# Altium PCB QCM_circuit.PcbDoc
Units mm, origin at the board's own origin, x right, y up, seen from the top; angles counter-clockwise.
Board outline 100 x 45 mm, 2 copper layers (Top Layer, Bottom Layer), stack 0.78 mm thick; 41 components, 21 nets, 118 pads, 195 vias.
Unrouted connection lines stored in the file: 3.
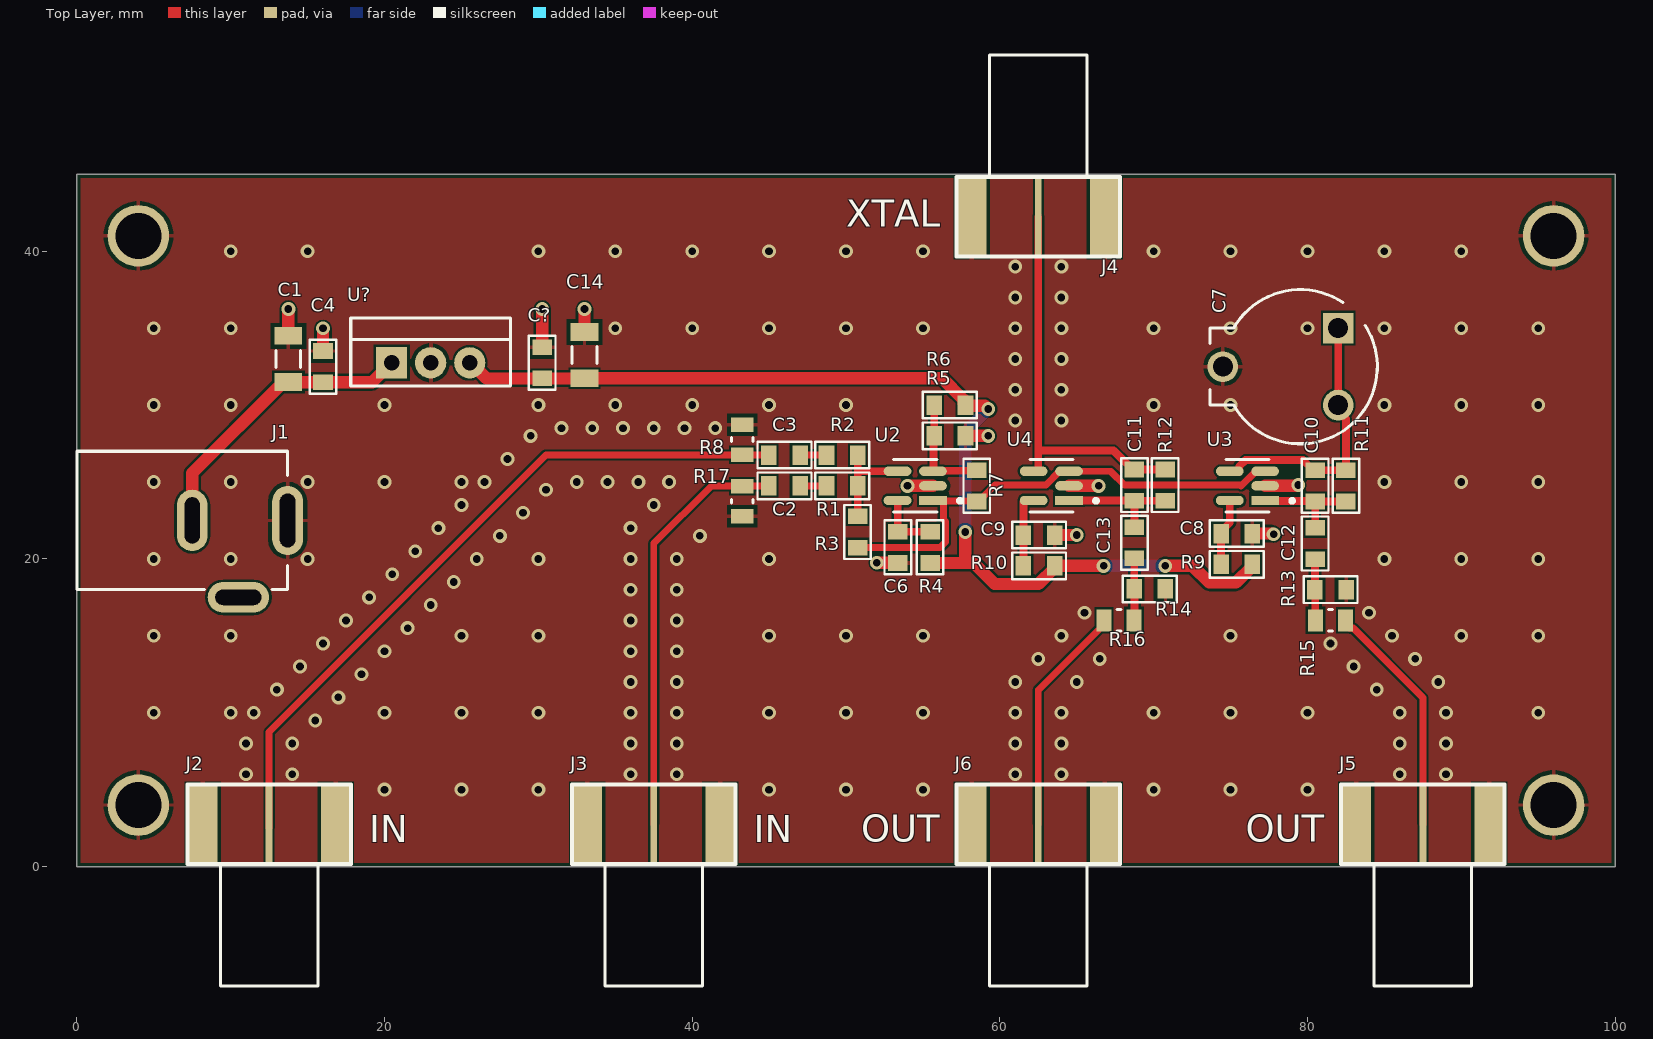
[diagram p0: Top Layer view]
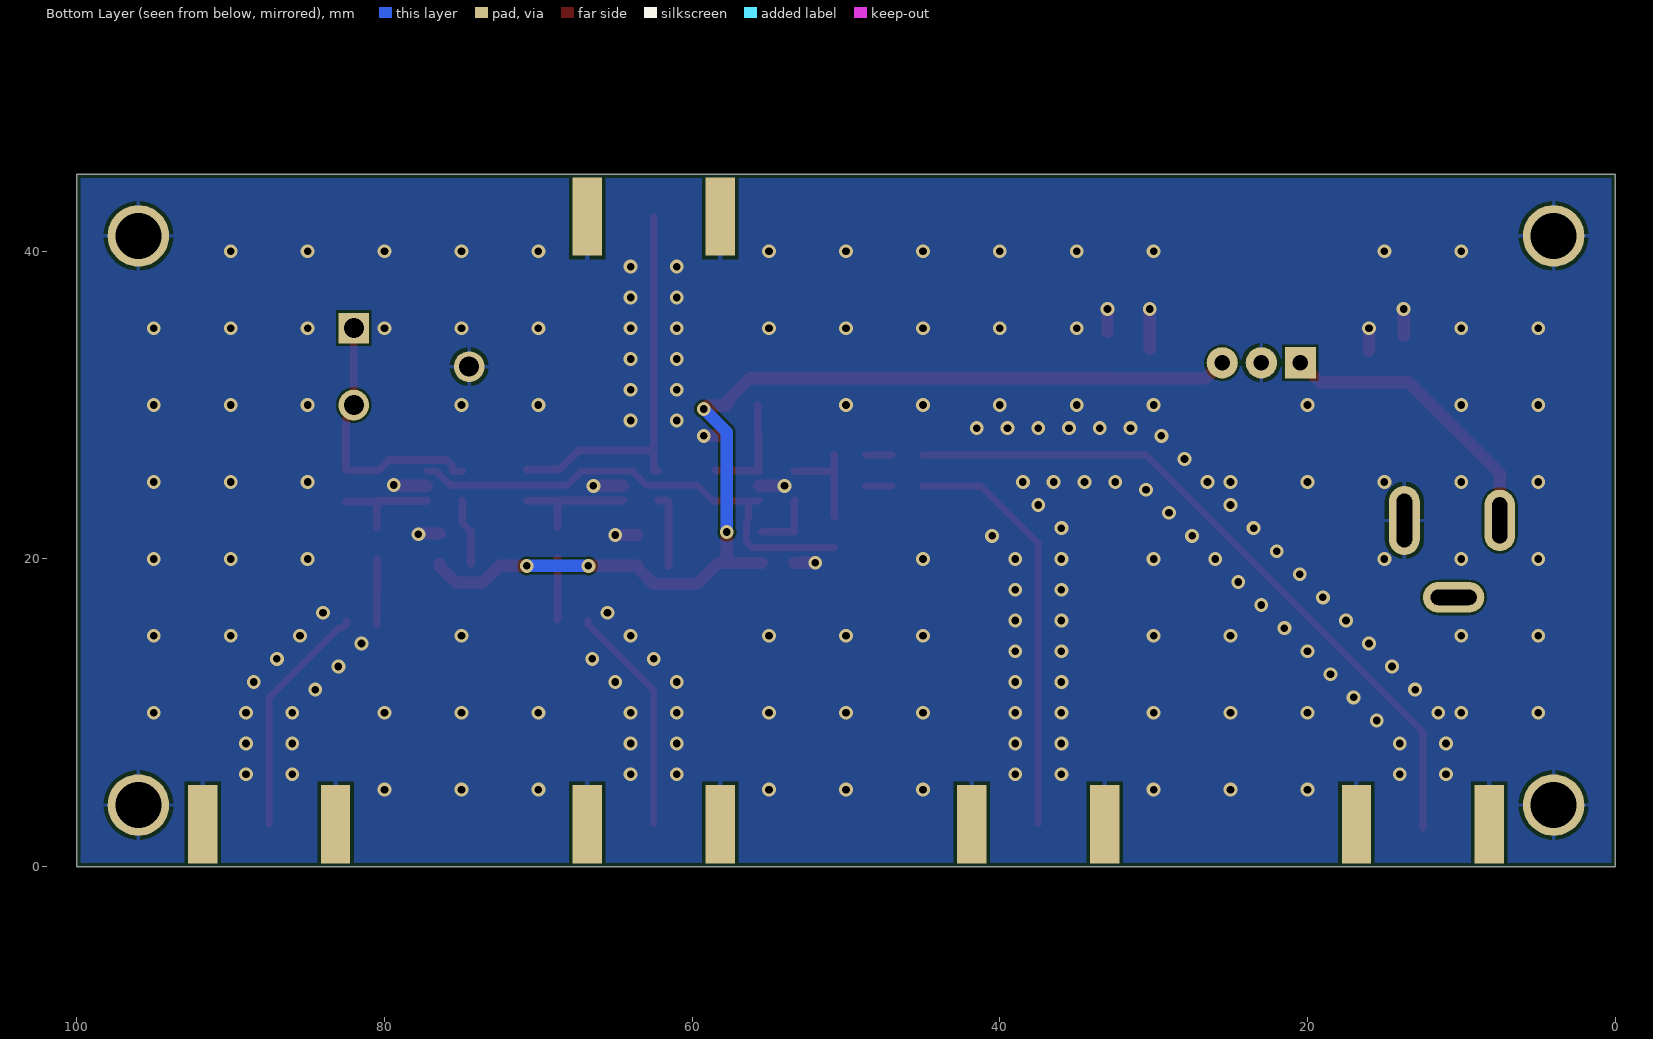
[diagram p1: Bottom Layer view, seen from below]
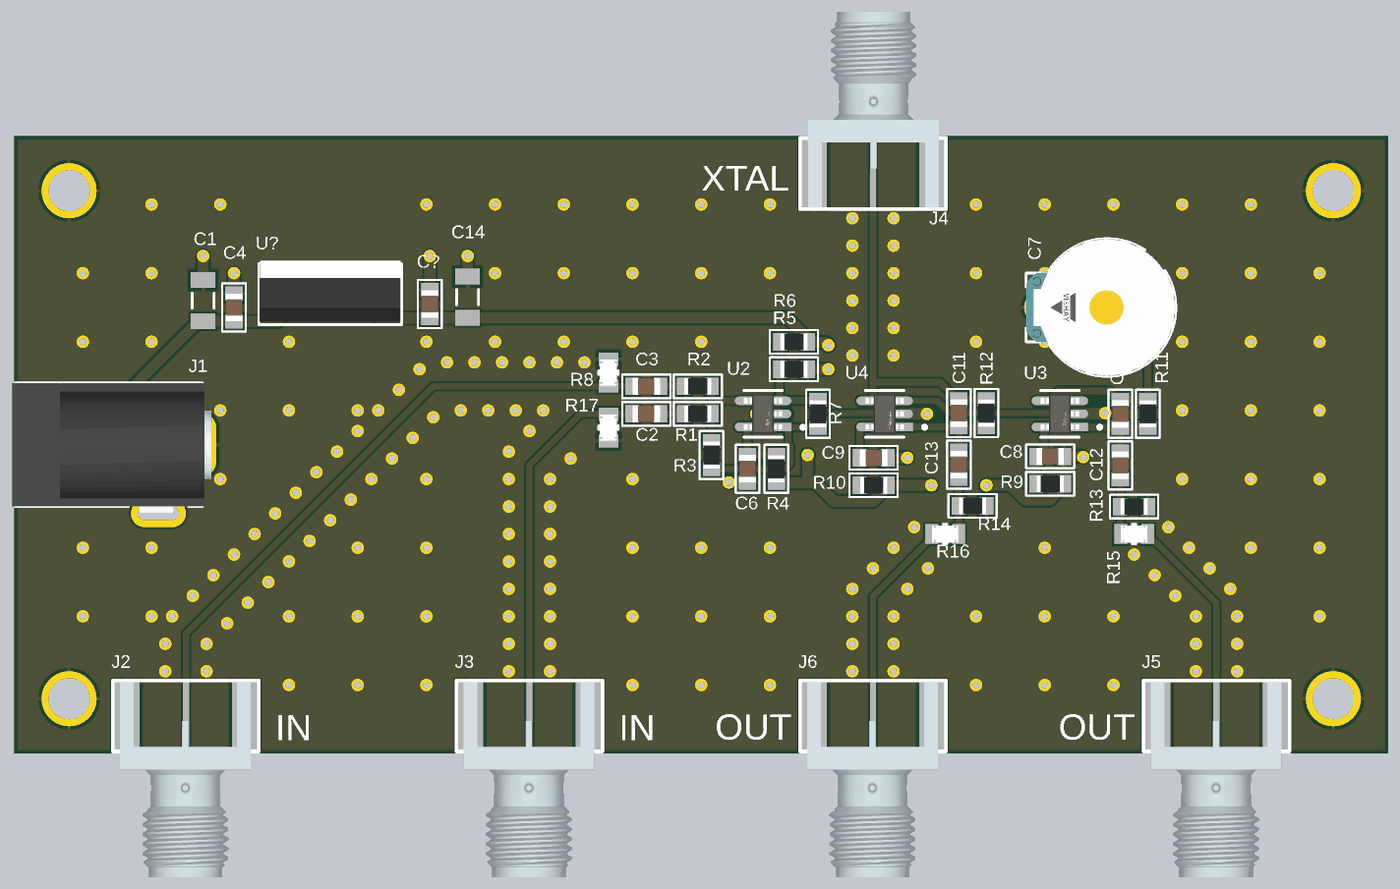
[diagram p2: 3D render of the assembled board from above, using the file's embedded part models]

## Layer stack, top to bottom
Top Solder: solder mask 0.01, Solder Resist, Dk 3.5
Top Layer: signal copper 0.035
Dielectric2: core 0.71, FR-4, Dk 4.3
Bottom Layer: signal copper 0.035
Bottom Solder: solder mask 0.01, Solder Resist, Dk 3.5

## Board outline
0,0 100,0 100,45 0,45

## Design rules (kind name [scope] priority, off if disabled: settings)
AssemblyTestPointUsage [All] p1 off:
AssemblyTestpoint [All] p1 off: testpointundercomponent=TRUE minsize=1.016 maxsize=2.54 preferedsize=1.524 minholesize=0 maxholesize=1.016 preferedholesize=0.813 testpointgrid=0.025 usegrid=TRUE gridtolerance=0 allowsidetop=TRUE allowsidebottom=TRUE
BoardOutlineClearance [All] p1: gap=0.25 ignorepadtopadclearanceinfootprint=FALSE except(0: Arc-SplitContinuation Track-SplitContinuation SMDPad-SplitContinuation THPad-SplitContinuation Via-SplitContinuation Fill-SplitContinuation Poly-SplitContinuation Region-SplitContinuation Text-SplitContinuation)
Clearance Clearance-xPP-xTP-xTT [All] p1: gap=0.15 ignorepadtopadclearanceinfootprint=FALSE except(0.01: Fill-Hole Poly-Hole Region-Hole Text-Hole; 0.2: Arc-Hole Track-Hole SMDPad-Hole THPad-Hole Via-Hole; 0.25: Arc-Arc Arc-Track Track-Track)
ComponentClearance [All] p1: gap=0.25 collisioncheckmode=3 verticalgap=0.25 showdistances=FALSE
DiffPairsRouting [All] p1: maxlimit=0.25 minlimit=0.25 mostfreqgap=0.25 toplayer_minwidth=0.381 toplayer_maxwidth=0.381 toplayer_prefwidth=0.381 bottomlayer_minwidth=0.381 bottomlayer_maxwidth=0.381 bottomlayer_prefwidth=0.381 maxuncoupledlength=12.5
FabricationTestPointUsage [All] p1 off: valid=0 allowmultiple=FALSE
FabricationTestpoint [All] p1 off: side=3 testpointundercomponent=TRUE minsize=1.016 maxsize=2.54 preferedsize=1.524 minholesize=0 maxholesize=1.016 preferedholesize=0.813 testpointgrid=0.025 allowsidetop=TRUE allowsidebottom=TRUE usegrid=TRUE gridtolerance=0
Height [All] p1: minheight=0 maxheight=25 prefheight=12.5
HoleSize HoleSize-PTH [All] p1: absolutevalues=TRUE maxlimit=7 minlimit=0.25 maxpercent=80.000 minpercent=20.000
HoleToHoleClearance [All] p1: gap=0.35 allowstackedmicrovias=TRUE
MinimumAnnularRing "Minimum IAR  >0.34mm" [((ObjectKind = 'Pad') OR (ObjectKind = 'Via')) And (Layer = 'MultiLayer') And (HoleDiameter > AsMM(0.34))] p1: minimumring=0.125 // minimum inner annular ring for pads > 0.45mm finished hole size
MinimumAnnularRing "Minimum IAR <=0.34mm" [((ObjectKind = 'Pad') OR (ObjectKind = 'Via')) And (Layer = 'MultiLayer') And (HoleDiameter <= AsMM(0.34))] p2: minimumring=0.175 // minimum inner annular ring for pads <= 0.45mm finished hole size
MinimumSolderMaskSliver [All] p1: minsoldermaskwidth=0.08
PlaneClearance PlaneClearance-IPI [All] p1: clearance=0.25
PlaneConnect [All] p1: planeconnectstyle=Direct reliefexpansion=0.25 reliefentries=4 reliefconductorwidth=0.5 reliefairgap=0.25
PolygonConnect PolygonConnect-xTW [All] p1: thpad.connectstyle=Relief thpad.reliefconductorwidth=0.25 thpad.reliefentries=4 thpad.polygonreliefangle="90 Angle" thpad.airgapwidth=0.25 smdpad.connectstyle=Relief smdpad.reliefconductorwidth=0.25 smdpad.reliefentries=2 smdpad.polygonreliefangle="0 Angle" smdpad.airgapwidth=0.25 via.connectstyle=Relief via.reliefconductorwidth=0.25 via.reliefentries=4 via.polygonreliefangle="90 Angle" via.airgapwidth=0.25
RoutingCorners [All] p1: cornerstyle=45-Degree minsetback=2.5 maxsetback=2.5
RoutingVias [InNet('+9')] p1: holewidth=0.711 width=1.27 viastyle="Through Hole" minholewidth=0.711 minwidth=1.27 maxholewidth=0.711 maxwidth=1.27
RoutingVias "Routing VIAs" [All] p2: holewidth=0.5 width=0.85 viastyle="Through Hole" minholewidth=0.5 minwidth=0.85 maxholewidth=0.9 maxwidth=1.25 useviatemplates=TRUE viatemplateguid#1={331BAD09-FCF4-48D2-A875-4A33C9B82B72} viatemplateguid#2={6A946846-BB7C-48EE-9F70-67F61FD11D76} viatemplatename#1=via_r65h25_mm viatemplatename#2=via_r90h50_mm // Standard VIAs
SMDNeckDown [All] p1: percent=100.000
SilkToSilkClearance [All] p1: silktosilkclearance=0.05
SilkToSolderMaskClearance SilkscreenOverComponentPads [IsPad] p1: minsilkscreentomaskgap=0.1 clearancetoexposedcopper=TRUE
SolderMaskExpansion [All] p1: expansion=0 istentingtop=FALSE
SupplyNets "Schematic Supply Nets_2" [InNet('+9')] p1: voltage=0.000
SupplyNets "Schematic Supply Nets_1" [InNet('+12')] p2: voltage=0.000
SupplyNets "Schematic Supply Nets" [InNet('GND')] p3: voltage=0.000
UnRoutedNet [All] p1: checkbadconnections=TRUE
Width Width_PWR [InNet('GND')] p1: maxlimit=1 minlimit=0.5 preferedwidth=0.5 minimp=50.000000 maximp=50.000000 favimp=50.000000
Width Width-xTW [All] p2: maxlimit=10 minlimit=0.15 preferedwidth=0.5 minimp=50.000000 maximp=50.000000 favimp=50.000000
14 further rules are at their usual default settings.

## Classes and differential pairs
component class QCM_circuit: C1 C3 C6 C8 C10 C12 C? J1 J2 J3 J5 R1 R2 R3 R4 R5 R6 R7 R10 R11 R12 R15 U2 U3 U?

## Components (designator, comment, footprint, x,y, rotation, side; value= is the part's Value field where it differs from the comment)
C1 "CAP 68nF 100V 1206(3216)" CAPC1206(3216)170_N 13.75,33 r270 top value=68nF
C2 "C_0805" C_0805 46,24.75 r0 top
C3 "C_0805" C_0805 46,26.75 r0 top
C4 "C_0805" C_0805 16,32.5 r270 top
C6 "100nF" C_0805 53.37,20.75 r270 top
C7 "FC280832659" FP-BFC280832659-MFG 79.5,32.5 r270 top value=5.5-65pF
C8 "100nF" C_0805 75.4,21.65 r0 top
C9 "100nF" C_0805 62.55,21.55 r0 top
C10 "C_0805" C_0805 80.5,24.75 r90 top
C11 "C_0805" C_0805 68.75,24.8 r90 top
C12 "C_0805" C_0805 80.5,21 r270 top
C13 "C_0805" C_0805 68.75,21.05 r270 top
C14 "CAP 68nF 100V 1206(3216)" CAPC1206(3216)170_N 33,33.25 r270 top value=68nF
C? "C_0805" C_0805 30.25,32.75 r270 top
J1 "KLDX-0202-B" KYCN-KLDX-0202-B_V 0,22.5 r0 top
J2 "SMA" SMA_SM_JOHNSON_142-0701-841 12.5,2.75 r180 top
J3 "SMA" SMA_SM_JOHNSON_142-0701-841 37.5,2.75 r180 top
J4 "SMA" SMA_SM_JOHNSON_142-0701-841 62.5,42.25 r0 top
J5 "SMA" SMA_SM_JOHNSON_142-0701-841 87.5,2.75 r180 top
J6 "SMA" SMA_SM_JOHNSON_142-0701-841 62.5,2.75 r180 top
R1 "R_0805" R_0805 49.75,24.75 r180 top
R2 "R_0805" R_0805 49.75,26.75 r180 top
R3 "R_0805" R_0805 50.75,21.75 r90 top
R4 "10" R_0805 55.465,20.75 r90 top
R5 "R_0805" R_0805 56.75,28 r0 top
R6 "R_0805" R_0805 56.75,30 r180 top
R7 "DNP" R_0805 58.5,24.75 r90 top
R8 "CRCW080550R0FKTA" FP-D12-CRCW0805-MFG 43.25,27.75 r270 top
R9 "10" R_0805 75.4,19.65 r180 top
R10 "10" R_0805 62.55,19.55 r180 top
R11 "R_0805" R_0805 82.5,24.75 r270 top
R12 "R_0805" R_0805 70.75,24.8 r270 top
R13 "100k" R_0805 81.5,18 r0 top
R14 "100k" R_0805 69.75,18.05 r0 top
R15 "CRCW080550R0FKTA" FP-D12-CRCW0805-MFG 81.5,16 r0 top
R16 "CRCW080550R0FKTA" FP-D12-CRCW0805-MFG 67.75,16 r180 top
R17 "CRCW080550R0FKTA" FP-D12-CRCW0805-MFG 43.25,23.75 r90 top
U2 "OPA656NB/250" FP-DBV0005A-IPC_A 54.5,24.75 r180 top
U3 "OPA656NB/250" FP-DBV0005A-IPC_A 76.1,24.75 r180 top
U4 "OPA656NB/250" FP-DBV0005A-IPC_A 63.35,24.75 r180 top
U? "7809" TO220V 23,32.75 r0 top

## Footprints (in the part's own frame and the unit in brackets; to place one, negate y for a bottom-side part, rotate by r counter-clockwise, add the part's x,y. Pads: shape width x height; smd on the part's side, far side on the other; paste and mask are expansions set on the pad)
C_0805 [mil]
  rect 40x50 smd: 1(-40,0) 2(40,0)
  silkscreen extent -69,-34 69,34, body extent -39,-25 39,25, height 49
CAPC1206(3216)170_N [mm] "Chip Capacitor, Body 3.2x1.6mm, Height 1.7mm, IPC Medium Density"
  rect 1.15x1.8 smd: 1(-1.5,0) 2(1.5,0)
  silkscreen extent -0.55,-0.8 0.55,0.8, body extent -1.7,-0.9 1.7,0.9, height 1.7
FP-BFC280832659-MFG [mm]
  rect 2x2 hole 1.3 paste-2539.97 mask+0: 1(-2.5,2.5)
  round 2 hole 1.3 paste-2539.97 mask+0: 2(2.5,2.5) 3(0,-5)
  silkscreen extent -5.01,-5.85 5.02,5.04, body extent -5.4,-6.1 5.4,5.2, height 0.25
FP-D12-CRCW0805-MFG [mm]
  rect 0.95x1.45 smd paste+0 mask+0: 1(-0.975,0) 2(0.975,0)
  silkscreen extent -0.13,-0.7 0.13,0.7, body extent -1.55,-0.82 1.55,0.82, height 0.25
FP-DBV0005A-IPC_A [mm]
  rect 1.805x0.612 smd paste+0 mask+0: 1(-1.15,0.95)
  rrect100% 1.805x0.612 smd paste+0 mask+0: 2(-1.15,0) 3(-1.15,-0.95) 4(1.15,-0.95) 5(1.15,0.95)
  silkscreen extent -3.03,-1.7 1.4,1.7, body extent -2.55,-1.95 2.55,1.95, height 0.25
KYCN-KLDX-0202-B_V [mm] "3 Conductor Jack, 9 x 14.5 mm Body"
  oval 2x4.5 hole 1 slot 3.5 at 90 deg: 1(13.7,0)
  oval 2x4 hole 1 slot 3 at 90 deg: 2(7.5,0)
  oval 4x2 hole 1 slot 3 at 0 deg: 3(10.5,-5)
  silkscreen extent 0,-4.5 13.7,4.5, body extent -0.15,-5 14.35,4.5, height 11
R_0805 [mil] "R 0805"
  rect 40x50 smd: 1(-40,0) 2(40,0)
  silkscreen extent -69,-34 69,34, body extent -39,-24 39,24, height 18
SMA_SM_JOHNSON_142-0701-841 [mil] "SMA PCB Surface Mount Johnson 142-0701-841"
  rect 17.72x200 smd: 1(0,0)
  rect 75x200 smd: 2(-170,0) 2(170,0) 2(170,0)
  rect 75x200 smd far side: 2(-170,0) 2(170,0)
  silkscreen extent -209,-102 209,414, body extent -186,-98 189,464, height 156
TO220V [mil] "TO220V"
  rect 80x80 hole 40: 1(-100,0)
  round 80 hole 40: 2(0,0) 3(100,0)
  silkscreen extent -205,-59 205,115, body extent -202,-51 202,124, height 743

## Part data
C1 C14: library part CMP-1037-04098-1, "CAP 68nF 100V ±5% 1206 (3216 Metric) Thickness 1.7mm SMD", Case-EIA=1206, Case-Metric=3216, Rated Voltage="100 V", Tolerance=Â±5%, Max Thickness="1.7 mm", Technology=SMT
C6 C8 C9: library part C_0805
C7: library part CMP-02422-000001-1, "CAP TRIMMER 5.5-65PF 150V TH", Capacitance=5.5-65pF, Manufacturer="Vishay BC Components", Manufacturer Part Number=BFC280832659, Temperature="-40°C to +70°C", Temperature Coefficient=+300/-700ppm/°C, Temperature Range High=+70°C, Temperature Range Low=-40°C, Voltage Rating=150V, Automotive=No, Category=Cap, ComponentLink2Description=Datasheet, ComponentLink2URL=https://www.vishay.com/docs/28528/bfc2808-10mm.pdf, Device Class L1="Passive Components", Device Class L2=Capacitors, Device Class L3="Trimmer / Variable Capacitors", Digikey Description="CAP TRIMMER 5.5-65PF 150V TH", Height=11mm, Lead Free=Yes, Material=Polypropylene, Mouser Description="Trimmer / Variable Capacitors TRIMMER CAPACITOR", Octopart=https://octopart.com/bfc280832659-vishay-41937824, Package=BFC280832659, RoHS=TRUE
J1: library part CMP-0256-00001-1, "3 Conductor Power Jack, 2 break 2 aux contacts", ComponentLink1Description="Manufacturer URL", ComponentLink1URL=http://kycon.com/, ComponentLink2Description=Datasheet, ComponentLink2URL=http://anacapa.kycon.com/Catalog_PDF/KLDX_0202.pdf, Contact Finish=Brass, Mounting Technology="Through Hole", PackageDescription="Jack, 9 x 14.5 mm Body, 2.5 mm Center Pin Diameter", PackageReference=KLDX-0202-B, PartNumber=KLDX-0202-B
J2 J3 J4 J5 J6: library part SMA_SM_JOHNSON_142-0701-841
R4 R7 R9 R10 R13 R14: library part R_0805
R8 R15 R16 R17: library part CMP-00030-21390498-1, "CRCW080550R0FKTA Res Thick Film 0805 50 Ohm 1% 0.125W(1/8W) ±100ppm/C Pad SMD Automotive T/R", Case Code (Imperial)=0805, Case Code (Metric)=2012, Max Operating Temperature=155°C, Min Operating Temperature=-55°C, Power Rating=125mW, Resistance=50Ω, Temperature Coefficient=100ppm/°C, Tolerance=1%, Voltage Rating=150V, Case/Package=0805, Composition="Thick Film", Contact Plating="Lead, Tin", Height=450µm, Lead Free="Contains Lead", Length=2mm, NexarPartId=21390498, RoHS=Non-Compliant, Weight=5.499807mg, Width=1.25mm
U2 U3 U4: library part CMP-0018-00414-3, "IC OPAMP VFB 1 CIRCUIT SOT23-5", Case/Package=SOT-23, Dual Supply Voltage=5V, Input Bias Current=20pA, Input Offset Voltage (Vos)=600uV, Max Dual Supply Voltage=6V, Max Operating Temperature=85°C, Max Supply Voltage=12V, Min Operating Temperature=-40°C, Min Supply Voltage=10V, Nominal Supply Current=16mA, Package Quantity=250, Power Supply Rejection Ratio (PSRR)=74dB, Bandwidth=230MHz, Common Mode Rejection Ratio=88dB, Gain Bandwidth Product=230MHz, Height=1.15mm, Lead Free="Lead Free", Length=2.9mm, Max I/O Voltage=600uV, Number of Amplifiers=1, Number of Channels=1, Number of Circuits=1, Number of Elements=1, Number of Pins=5, Operating Supply Voltage=12V, Packaging="Tape and Reel", Radiation Hardening=No, REACH SVHC="No SVHC", Settling Time=16ns, Slew Rate=290V/µs, Unity Gain Bandwidth Product=230MHz, Width=1.6mm
U?: "Standard +9V 1A positive fixed voltage regulator in TO-220 housing", Case/Package=TO, Dropout Voltage=2V, Manufacturer 1=STMicroelectronics, Manufacturer Part Number 1=L7809CV, Max Input Voltage=35V, Max Operating Temperature=125°C, Max Output Current=1.5A, Min Input Voltage=11V, Min Operating Temperature=0°C, Min Output Voltage=9V, Package Quantity=50, Power Supply Rejection Ratio (PSRR)=55dB, Quiescent Current=8mA, Supplier Part Number 1=511-L7809CV, Tolerance=5%, Accuracy=2%, ComponentLink1Description=http://www.jameco.com/Jameco/Products/ProdDS/902071.pdf, ComponentLink1URL=http://www.jameco.com/Jameco/Products/ProdDS/902071.pdf, ComponentLink2Description=http://www.ti.com/lit/ds/symlink/lm7805c.pdf, ComponentLink2URL=http://www.ti.com/lit/ds/symlink/lm7805c.pdf, ComponentLink3Description=http://www.ti.com/general/docs/lit/getliterature.tsp?genericPartNumber=LM7815C&&fileType=pdf, ComponentLink3URL=http://www.ti.com/general/docs/lit/getliterature.tsp?genericPartNumber=LM7815C&&fileType=pdf, ComponentLink4Description=https://datasheet.ciiva.com/27055/1991694-27055797.pdf?src-supplier=Jameco, ComponentLink4URL=https://datasheet.ciiva.com/27055/1991694-27055797.pdf?src-supplier=Jameco, ComponentLink5Description=https://datasheet.ciiva.com/26331/179191-da-01-en-spannungsregler-l7809cv-to-220-stm-26331022.pdf?src-supplier=Conrad, ComponentLink5URL=https://datasheet.ciiva.com/26331/179191-da-01-en-spannungsregler-l7809cv-to-220-stm-26331022.pdf?src-supplier=Conrad, ComponentLink6Description=https://datasheet.ciiva.com/1511/1805459-1511921.pdf?src-supplier=Element14, ComponentLink6URL=https://datasheet.ciiva.com/1511/1805459-1511921.pdf?src-supplier=Element14, ComponentLink7Description=https://datasheet.ciiva.com/2044/cd00000444-2044161.pdf?src-supplier=Digi-Key, ComponentLink7URL=https://datasheet.ciiva.com/2044/cd00000444-2044161.pdf?src-supplier=Digi-Key, ComponentLink8Description=https://datasheet.ciiva.com/16393/cd00000444-16393733.pdf?src-supplier=Future+Electronics, ComponentLink8URL=https://datasheet.ciiva.com/16393/cd00000444-16393733.pdf?src-supplier=Future+Electronics, ComponentLink9Description=https://datasheet.ciiva.com/3224/cd00000444-3224953.pdf?src-supplier=Avnet, ComponentLink9URL=https://datasheet.ciiva.com/3224/cd00000444-3224953.pdf?src-supplier=Avnet, ComponentLink10Description=https://datasheet.ciiva.com/18404/70013895-18404043.pdf?src-supplier=Allied+Electronics, ComponentLink10URL=https://datasheet.ciiva.com/18404/70013895-18404043.pdf?src-supplier=Allied+Electronics, Description 1="STMICROELECTRONICS - L7809CV - IC, V REG +9.0V, 7809, TO-220-3", Height=14.9mm, Lead Free="Lead Free", Length=10.4mm, Mount="Through Hole", Nominal Output Voltage=9V, Number of Outputs=1, Number of Pins=3, Number of Regulators=1, Output Configuration=Positive, Output Current=1.5A, Output Type=Fixed,Adjustable, Output Voltage=9V, Packaging=Rail/Tube, Polarity=Positive, Pricing="1=0.45, 10=0.374, 50=0.374, 100=0.228, 1000=0.176, 2000=0.15, 10000=0.14, 25000=0.133, 50000=0.13, 100000=0.125 (USD)", Radiation Hardening=No, REACH SVHC="No SVHC", RoHS=Yes, Stock 1=8768, Supplier 1=Mouser, Weight=0.01lb, Width=4.6mm

## Free pads (board coordinates)
  round 4 hole 3: 2(96,41) 3(96,4) 4(4,4) 5(4,41)

## Via types
v1: diameter 0.9, hole 0.5, Top Layer to Bottom Layer, 195 vias

## Nets (pads, with @x,y where several pads share a name; then routed paths per layer and width w, separated by ;. In a path a pad name is that pad's centre, name@x,y a point inside that pad or via, vN(x,y) a via of type N, cw(c..) or ccw(c..) an arc to the next point about the centre after c; other vN are vias at no path point)
+9: C14.2 C?.2 R4.1 R6.1 R9.1 R10.1 U?.3 | length 68.8
  Top Layer w0.8: U?.3 25.609,32.75 26.625,31.734 C?.2 32.984,31.734 C14.2 56.25,31.75 57.658,30.342 57.658,30.108 57.804,29.962 59.011,29.962 59.223,29.75 v1(59.25,29.75) ; R4.1 57.75,19.734 ; v1(57.75,21.75) 57.75,19.734 ; v1(66.75,19.55) R10.1 63.566,19.423 62.508,18.365 59.669,18.365 58.3,19.734 57.75,19.734 ; v1(70.75,19.55) 72.525,19.55 73.61,18.465 75.358,18.465 76.416,19.523 R9.1
  Bottom Layer w0.8: v1(57.75,21.75) 57.75,28.25 v1(59.25,29.75) ; v1(66.75,19.55) v1(70.75,19.55)
+12: C1.2 C4.2 J1.2 U?.1 | length 19
  Top Layer w0.8: J1.2 7.5,25.575 13.425,31.5 C1.2 13.758,31.492 15.992,31.492 C4.2 19.194,31.484 U?.1
GND: C1.1 C4.1 C6.2 C7.3 C8.2 C9.2 C14.1 C?.1 J1.1 J2.2 J3.2 J4.2 J5.2 J6.2 pad.2 pad.3 pad.4 pad.5 R5.2 R8.1 R13.2 R14.2 R17.1 U2.2 U3.2 U4.2 U?.2 | length 18.8
  Top Layer w0.8: C1.1 v1(13.75,36.25) ; C4.1 v1(16,35) ; C?.1@30.25,33.658 v1(30.25,36.25) ; C14.1 v1(33,36.25) ; v1(52,19.75) 52.008,19.742 53.362,19.742 C6.2 ; v1(54,24.75) U2.2 ; R5.2 v1(59.25,28) ; C9.2 v1(65,21.55) ; U4.2 v1(66.423,24.75) ; C8.2 77.723,21.65 77.773,21.6 v1(77.8,21.6) ; U3.2 79.323,24.75 79.373,24.8 v1(79.4,24.8)
  other v1: 20,5 25,5 30,5 45,5 50,5 55,5 70,5 75,5 80,5 11,6 14,6 36,6 39,6 61,6 64,6 86,6 89,6 11,8 14,8 36,8 39,8 61,8 64,8 86,8 89,8 15.5,9.5 5,10 10,10 11.5,10 20,10 25,10 30,10 36,10 39,10 45,10 50,10 55,10 61,10 64,10 70,10 75,10 80,10 86,10 89,10 95,10 17,11 13,11.5 84.5,11.5 36,12 39,12 61,12 65,12 88.5,12 18.5,12.5 14.5,13 83,13 62.5,13.5 66.5,13.5 87,13.5 20,14 36,14 39,14 16,14.5 81.5,14.5 5,15 10,15 25,15 30,15 45,15 50,15 55,15 64,15 75,15 85.5,15 90,15 95,15 21.5,15.5 17.5,16 36,16 39,16 65.5,16.5 84,16.5 23,17 19,17.5 36,18 39,18 24.5,18.5 20.5,19 5,20 10,20 15,20 26,20 30,20 36,20 39,20 45,20 85,20 90,20 95,20 22,20.5 27.5,21.5 40.5,21.5 23.5,22 36,22 29,23 25,23.5 37.5,23.5 30.5,24.5 5,25 10,25 15,25 20,25 25,25 26.5,25 32.5,25 34.5,25 36.5,25 38.5,25 85,25 90,25 95,25 28,26.5 29.5,28 31.5,28.5 33.5,28.5 35.5,28.5 37.5,28.5 39.5,28.5 41.5,28.5 61,29 64,29 5,30 10,30 20,30 30,30 35,30 40,30 45,30 50,30 70,30 75,30 85,30 90,30 95,30 61,31 64,31 61,33 64,33 5,35 10,35 35,35 40,35 45,35 50,35 55,35 61,35 64,35 70,35 75,35 80,35 85,35 90,35 95,35 61,37 64,37 61,39 64,39 10,40 15,40 30,40 35,40 40,40 45,40 50,40 55,40 70,40 75,40 80,40 85,40 90,40
NetC2_1: C2.1 J3.1 R17.2 | length 27.3
  Top Layer w0.45: J3.1 37.5,21 41.25,24.75 C2.1
NetC2_2: C2.2 R1.2 | length 1.7
  Top Layer w0.45: C2.2 R1.2
NetC3_1: C3.1 J2.1 R8.2 | length 46.2
  Top Layer w0.45: J2.1@12.5,2.5 12.5,8.75 30.5,26.75 43.5,26.75 C3.1
NetC3_2: C3.2 R2.2 | length 1.7
  Top Layer w0.45: C3.2 R2.2
NetC6_1: C6.1 R4.2 U2.5 | length 4.1
  Top Layer w0.5: U2.5 53.36,23.79 53.36,21.776 C6.1 R4.2
NetC7_1: C7.1 C7.2 C10.2 R11.1 U3.4 | length 17.7
  Top Layer w0.5: U3.4 75.515,25.7 75.567,25.752 75.567,26.018 75.974,26.425 79.714,26.425 80.373,25.766 C10.2 R11.1 82.5,29.094 82,29.594 C7.2 C7.1
NetC8_1: C8.1 R9.2 U3.5 | length 4.3
  Top Layer w0.5: R9.2 C8.1 ; C8.1@74.384,21.777 74.949,22.342 U3.5
NetC9_1: C9.1 R10.2 U4.5 | length 4.9
  Top Layer w0.5: R10.2 C9.1 61.534,23.701 61.633,23.8 U4.5
NetC10_1: C10.1 C12.1 R11.2 U3.1 | length 7
  Top Layer w0.5: U3.1 77.283,23.767 80.467,23.767 C10.1 ; C12.1 C10.1 ; R11.2 C10.1
NetC11_1: C11.1 C13.1 R12.2 U4.1 | length 8
  Top Layer w0.5: U4.1 64.508,23.792 68.742,23.792 C11.1 ; C13.1 C11.1 ; R12.2 C11.1
NetC11_2: C11.2 J4.1 R12.1 U4.4 | length 25.7
  Top Layer w0.5: U4.4 U4.4@62.261,25.7 ; U4.4@62.313,25.752 U4.4@62.261,25.7 ; J4.1 62.5,27.05 ; R12.1 C11.2 68.623,25.816 67.389,27.05 62.5,27.05 ; U4.4@62.261,25.7 62.448,25.7 62.5,25.752 62.5,27.05
NetC12_2: C12.2 R13.1 R15.1 | length 4
  Top Layer w0.5: C12.2 80.492,19.976 80.492,18.008 R13.1 80.505,17.98 R15.1@80.505,16.021 ; R15.1@80.505,15.771 R15.1@80.525,15.75
NetC13_2: C13.2 R14.1 R16.1 | length 4
  Top Layer w0.5: C13.2 68.742,20.026 68.742,18.058 R14.1 68.754,18.03 68.754,16.071 R16.1@68.775,16.05
NetJ5_1: J5.1 R15.2 | length 15.5
  Top Layer w0.45: R15.2 82.475,15.75 82.725,15.5 82.975,15.5 87.5,10.975 J5.1
NetJ6_1: J6.1 R16.2 | length 15
  Top Layer w0.45: J6.1 62.5,11.475 66.775,15.75 R16.2
NetR1_1: R1.1 R2.1 R3.2 U2.4 | length 6.6
  Top Layer w0.5: R3.2 50.758,22.774 50.758,24.742 R1.1 50.766,25.75 ; R2.1 50.766,25.75 ; U2.4 50.816,25.7 50.766,25.75
NetR3_1: R3.1 R7.1 U2.1 U3.3 U4.3 | length 31.8
  Top Layer w0.45: R3.1 56.106,20.734 56.475,21.103 56.475,22.429 56.328,22.576 56.328,23.719 U2.1@56.28,23.767 ; U2.1 55.683,23.767 U2.1@56.28,23.767 ; U3.3 76.64,25.7 75.69,24.75 75.64,24.8 68.093,24.8 67.193,25.7 U4.3 63.89,25.7 62.99,24.8 59.693,24.8 58.66,23.767 U2.1@56.28,23.767
NetR5_1: R5.1 R6.2 R7.2 U2.3 | length 7.2
  Top Layer w0.5: R6.2 R5.1 55.692,27.958 55.692,25.742 U2.3 55.672,25.721 58.455,25.721 R7.2
pads on no net: J1.3

## Polygon pours and split planes (outlines as drawn)
GND on Bottom Layer "GND_L02_P001" (solid, pour order 1): -2,48 102,48 102,-3 -2,-3
GND on Top Layer "GND_L01_P000" (solid, pour order 0): -0.801,46.659 101.199,46.659 101.199,-2.341 -0.801,-2.341

## Silkscreen, mask and mechanical layers (free items; w line width, h text height)
Top Overlay:
  text "XTAL" at 50,41 h3
  text "OUT" at 51,1.033 h3
  text "OUT" at 76,1.033 h3
  text "IN" at 19,1 h3
  text "IN" at 44,1 h3
Mechanical 1:
  the board outline again, w0.2
  text ".Pcb_File_Name_No_Path" at 0,-2.5 h1.52